# Altium PCB NS6202_V2.0.PcbDoc
Units mm, origin at the board's own origin, x right, y up, seen from the top; angles counter-clockwise.
Board outline 60.47 x 59.8 mm, 2 copper layers (Top, Bottom), stack 0.323 mm thick; 94 components, 108 nets, 384 pads, 221 vias.
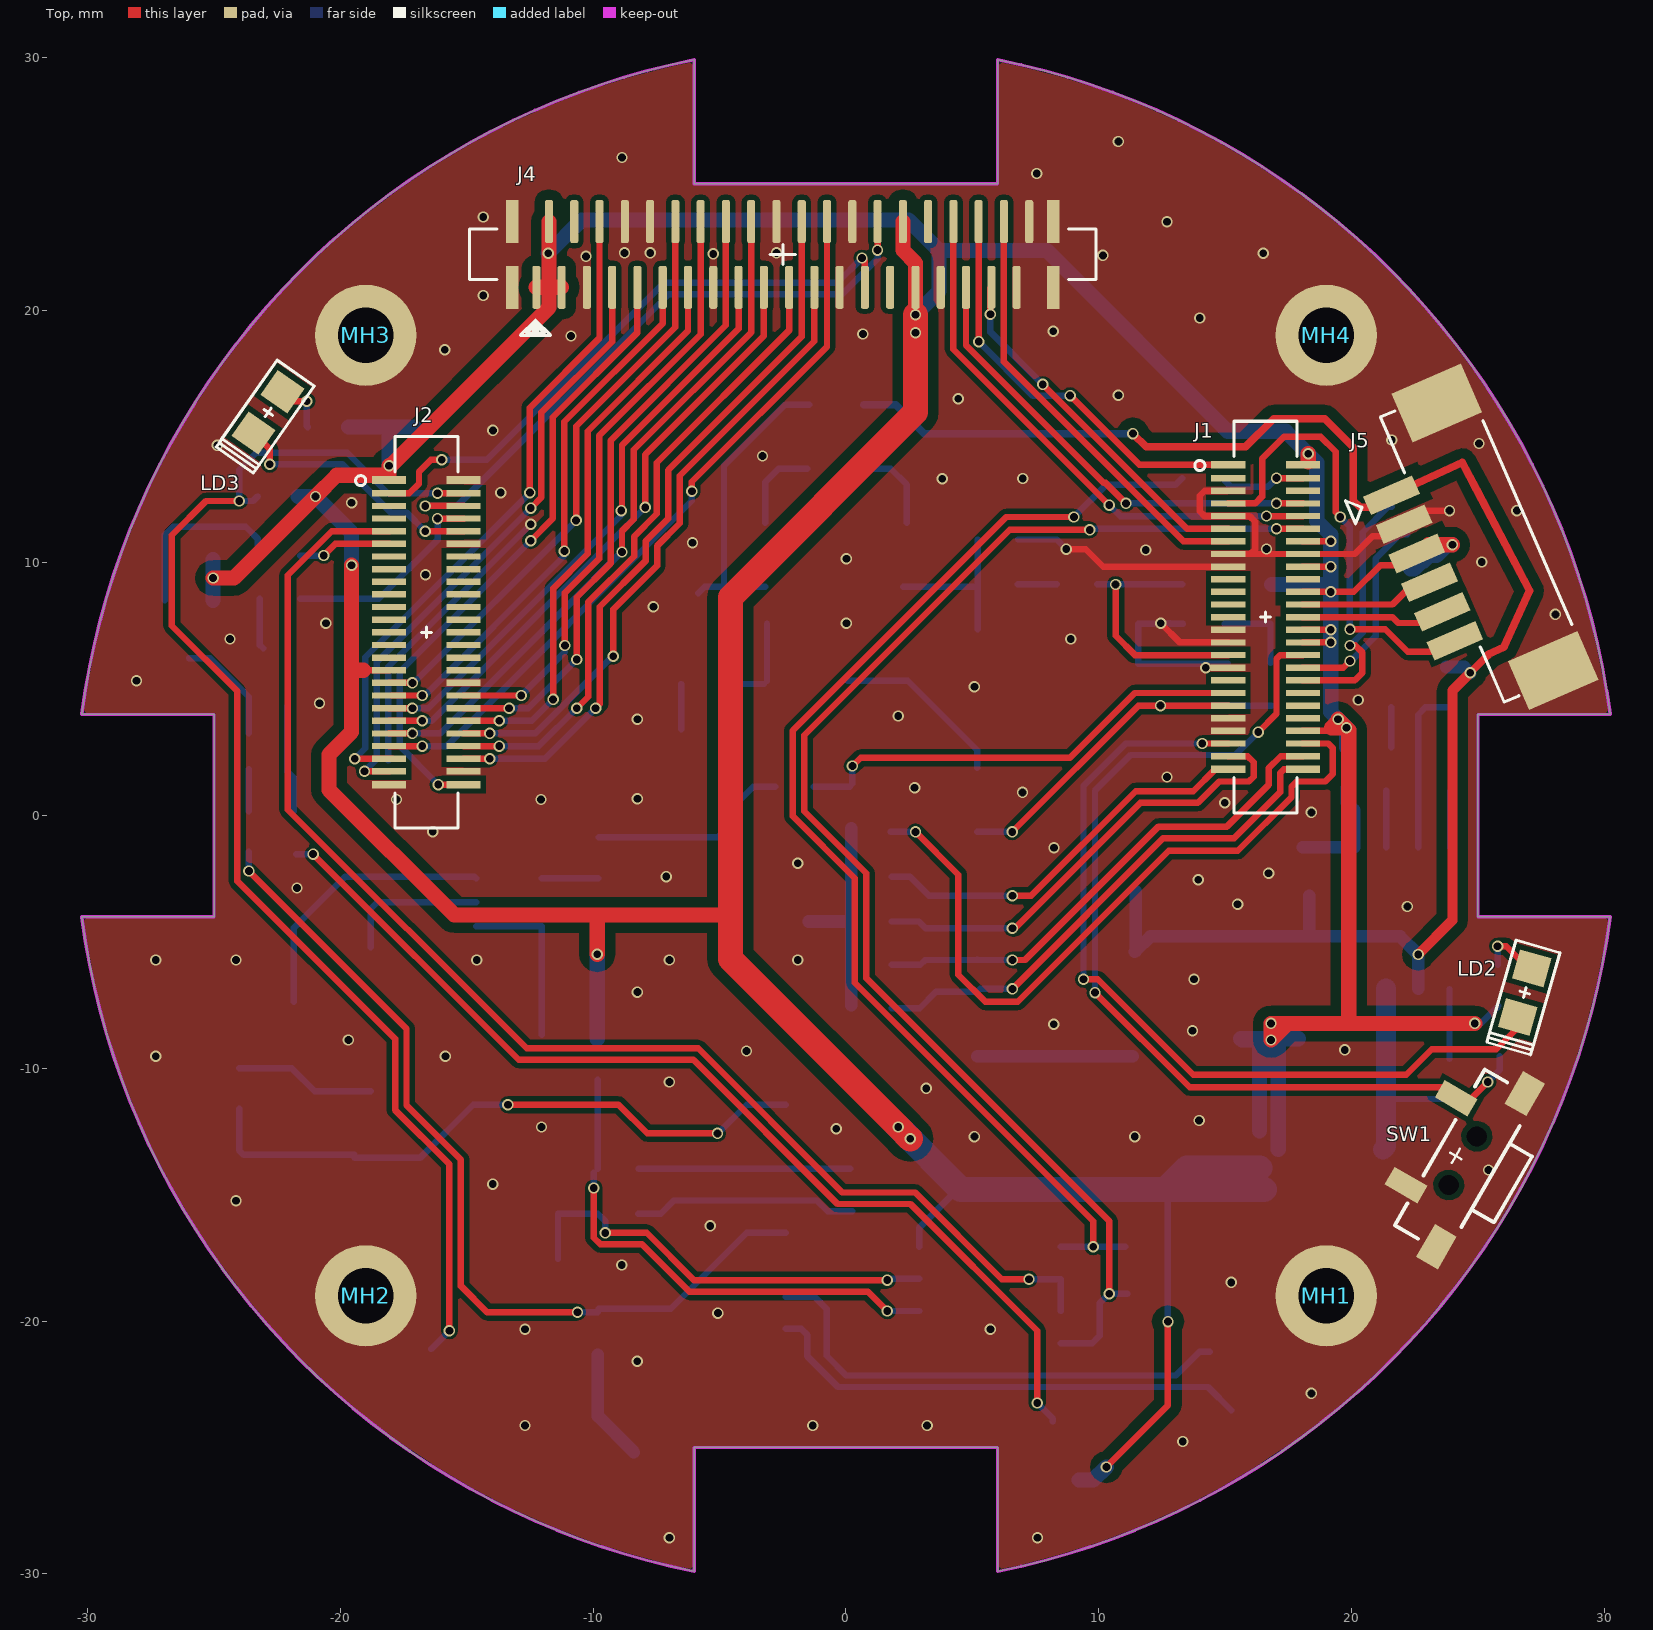
[diagram p0: Top view]
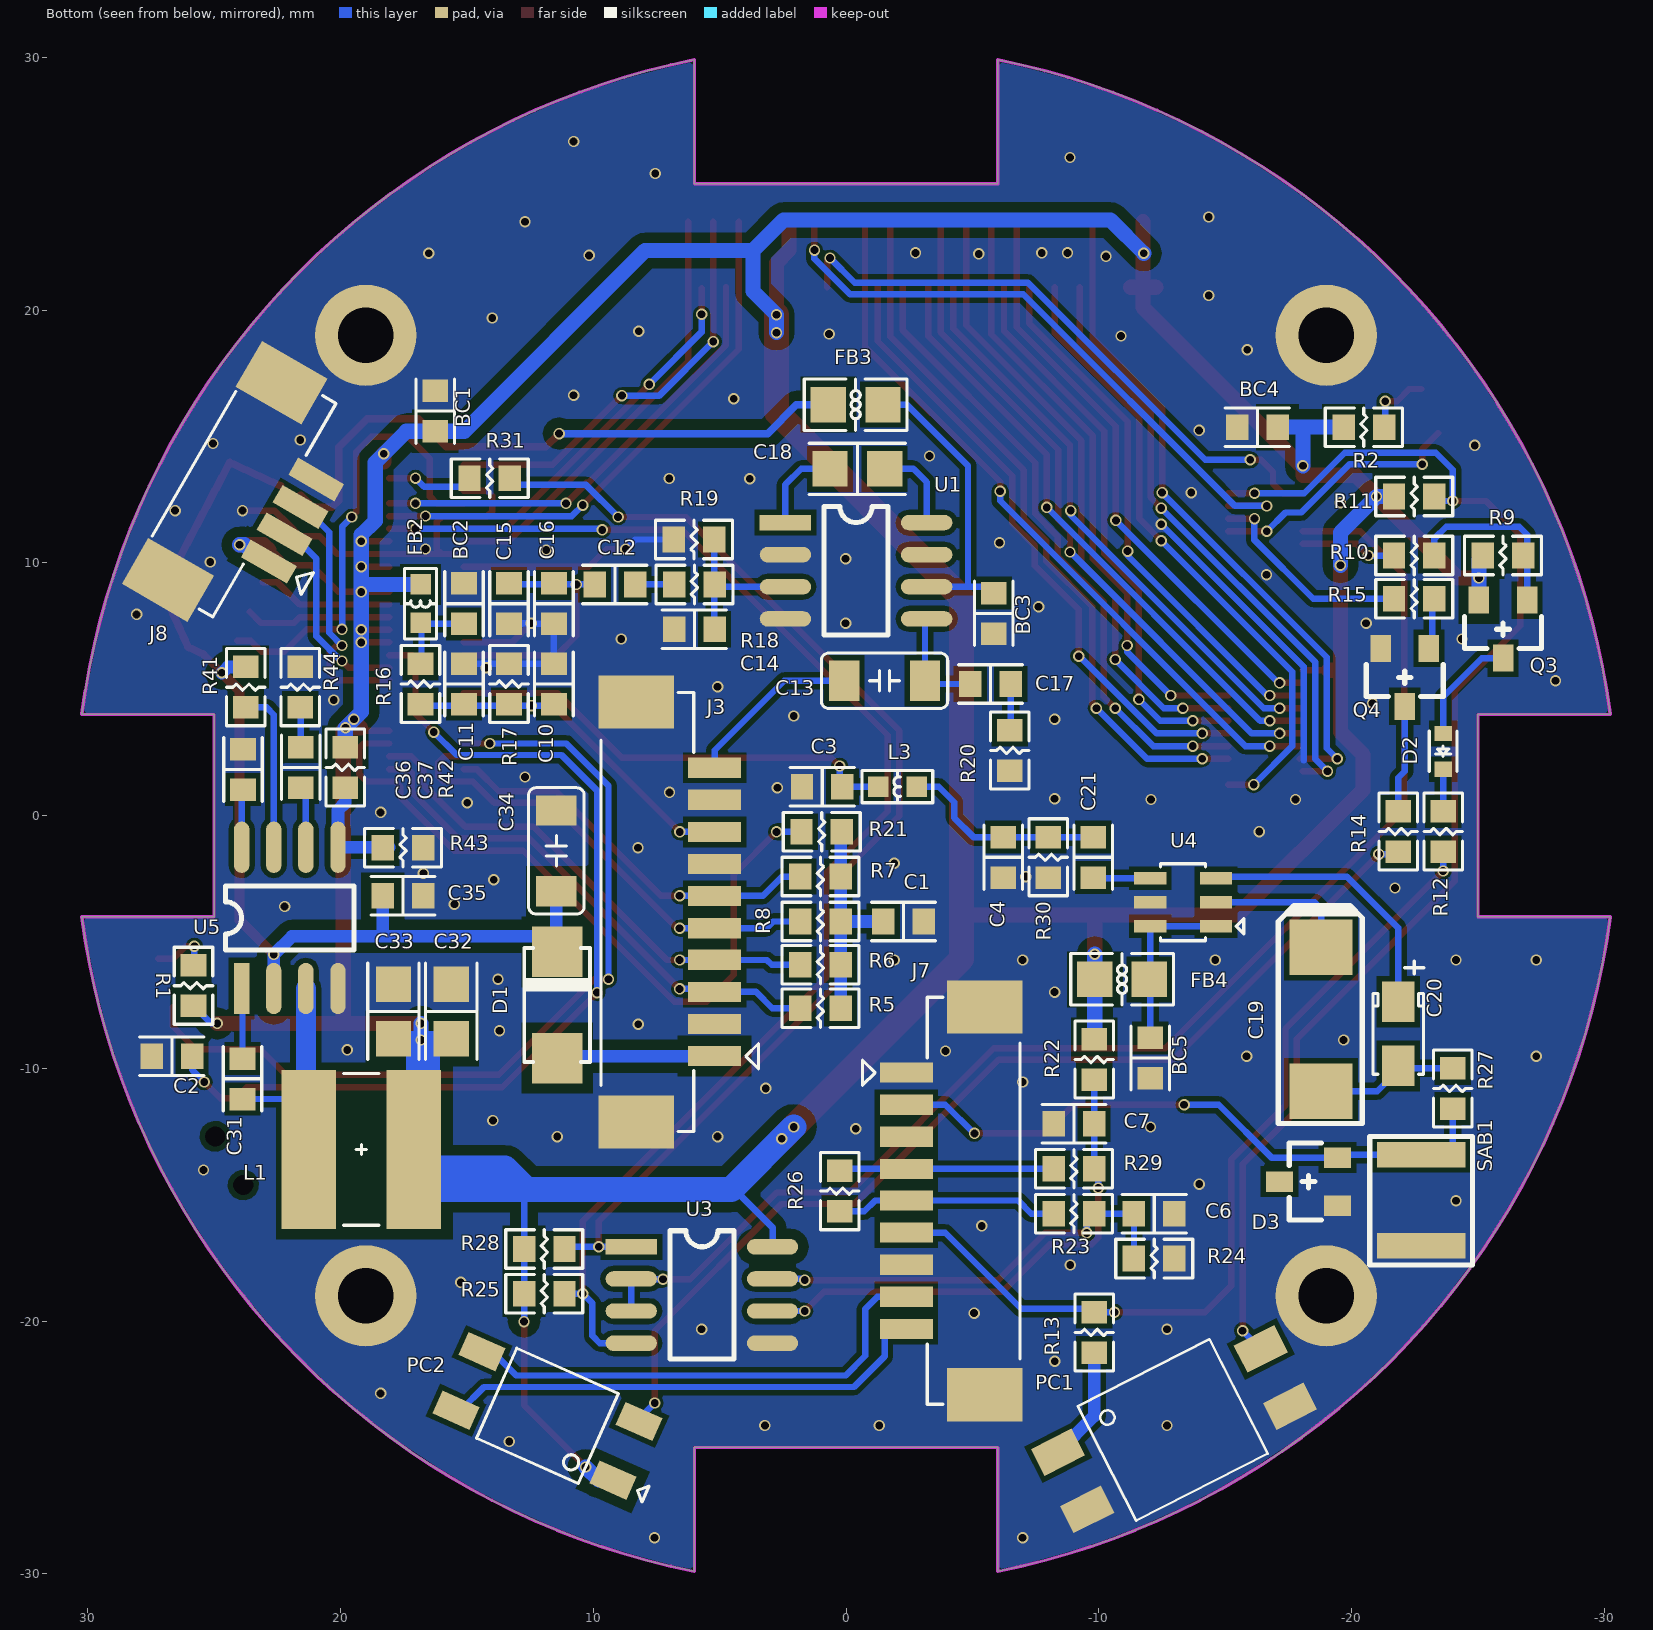
[diagram p1: Bottom view, seen from below]

## Layer stack, top to bottom
Solder Mask Top: solder mask 0.0102, Solder Resist, Dk 3.5
Top: signal copper 0.0343
Dielectric 1: core 0.254, FR-4, Dk 4.2
Bottom: signal copper 0.0343
Solder Mask Bottom: solder mask 0.0102, Solder Resist, Dk 3.5

## Board outline
-30.234,-4 -25,-4 -25,4 -30.234,4 -30.234,4.022 cw(c0,0) -6.018,29.9 -6,29.9 -6,25 6,25 6,29.9 6.011,29.902 cw(c0,0) 30.234,4.018 30.234,4 25,4 25,-4 30.228,-4 30.236,-4.001 cw(c0,0) 6.008,-29.902 6,-29.9 6,-25 -6,-25 -6,-29.9 -6.011,-29.902 cw(c0,0)

## Design rules (kind name [scope] priority, off if disabled: settings)
Clearance Clearance_4 [OnLayer('Keep-Out Layer') vs InNet('GND')] p1: gap=0.001
Clearance Clearance_3 [IsRegion vs (InNet('+12V') OR InNet('+12V_POE') OR InNet('+3.3V')OR InNet('+1.8V') or Innet('+5.0V')or Innet('N17301853'))] p2: gap=0.4
Clearance Clearance_2 [(InComponent('U1') OR InComponent('U4') OR InComponent('J2') OR InComponent('J7') OR InComponent('J8'))] p3: gap=0.2
Clearance Clearance_1 [IsVia] p4: gap=0.01
Clearance [All] p5: gap=0.2
ComponentClearance ComponentClearance_1 [InComponent('J6')] p1: gap=0 collisioncheckmode=3 verticalgap=0 showdistances=FALSE
ComponentClearance [All] p2: gap=0.01 collisioncheckmode=3 verticalgap=0.254 showdistances=FALSE
HoleSize [All] p1: absolutevalues=TRUE maxlimit=3.27 minlimit=0.025 maxpercent=80.000 minpercent=20.000
HoleToHoleClearance [All] p1: gap=0.01 allowstackedmicrovias=TRUE
MinimumSolderMaskSliver [All] p1: minsoldermaskwidth=0.01
PlaneConnect "Power Plane Connect Style - pads with no thermal_2" [(Name='U44-1') Or (Name='U45-1') Or (Name='U46-1') Or (Name='U47-1') Or (Name='U48-1') Or (Name='U49-1') Or (Name='U50-1') Or (Name='U51-1') Or (Name='U52-1') Or (Name='U55-1') Or (Name='U56-1') Or (Name='U57-1') Or (Name='U58-1') Or (Name='U6-1') Or (Name='U7-1') Or (Name='U8-1') Or (Name='U9-1')] p1: planeconnectstyle=NoConnect reliefexpansion=0.508 reliefentries=4 reliefconductorwidth=0.254 reliefairgap=0.254 // PAD - No Thermal Connect Rule
PlaneConnect "Power Plane Connect Style - pads with no thermal" [(Name='J10-0') Or (Name='J10-0/2') Or (Name='J11-0') Or (Name='J11-0/2') Or (Name='J13-6') Or (Name='J13-7') Or (Name='J2-13') Or (Name='J2-14') Or (Name='J4-15') Or (Name='J4-16') Or (Name='J6-5') Or (Name='J6-6') Or (Name='J6-9') Or (Name='J6-10') Or (Name='LS1-5') Or (Name='LS1-6') Or (Name='LS1-7') Or (Name='SW1-1') Or (Name='SW1-4') Or (Name='U10-1') Or (Name='U11-1') Or (Name='U12-1') Or (Name='U13-1') Or (Name='U14-1') Or (Name='U15-1') Or (Name='U16-1') Or (Name='U17-1') Or (Name='U18-1') Or (Name='U19-1') Or (Name='U20-1') Or (Name='U21-1') Or (Name='U22-1') Or (Name='U23-1') Or (Name='U24-1') Or (Name='U25-1') Or (Name='U26-1') Or (Name='U27-1') Or (Name='U28-1') Or (Name='U29-1') Or (Name='U30-1') Or (Name='U31-1') Or (Name='U32-1') Or (Name='U33-1') Or (Name='U34-1') Or (Name='U35-1') Or (Name='U36-1') Or (Name='U37-1') Or (Name='U38-1') Or (Name='U39-1') Or (Name='U40-1') Or (Name='U41-1') Or (Name='U42-1') Or (Name='U43-1')] p2: planeconnectstyle=NoConnect reliefexpansion=0.508 reliefentries=4 reliefconductorwidth=0.254 reliefairgap=0.254 // PAD - No Thermal Connect Rule
PlaneConnect [All] p3: planeconnectstyle=Relief reliefexpansion=0.508 reliefentries=4 reliefconductorwidth=0.254 reliefairgap=0.254
PolygonConnect [All] p1: connectstyle=Direct reliefconductorwidth=0.254 reliefentries=4 polygonreliefangle="90 Angle" airgapwidth=0.254
RoutingVias [All] p1: holewidth=0.308 width=0.45 viastyle="Through Hole" minholewidth=0.308 minwidth=0.45 maxholewidth=0.308 maxwidth=0.45
SilkToBoardRegionClearance [All] p1 off:
SilkToSilkClearance [All] p1: silktosilkclearance=0.01
SilkToSolderMaskClearance SilkToSolderMaskClearance_1 [OnLayer('Multi-Layer')] p1: minsilkscreentomaskgap=0 clearancetoexposedcopper=TRUE
SilkToSolderMaskClearance [IsPad] p2: minsilkscreentomaskgap=0.01 clearancetoexposedcopper=TRUE
SolderMaskExpansion [All] p1: expansion=0.102
Width Width_2 [InNet('VDD_3.3V')  or InNet('VDD_5.0V')] p1: maxlimit=3 minlimit=0.254 preferedwidth=2.4
Width Width_1 [InNet('+12V')] p2: maxlimit=1 minlimit=0.3 preferedwidth=0.5
Width [All] p3: maxlimit=1 minlimit=0.254 preferedwidth=0.254
21 further rules are at their usual default settings.

## Components (designator, comment, footprint, x,y, rotation, side; value= is the part's Value field where it differs from the comment)
BC1 "0.1uF" CS-1608#1 16.256,16.002 r270 bottom
BC2 "0.1uF" CS-1608#1 15.113,8.382 r270 bottom
BC3 "0.1uF" CS-1608#1 -5.842,8.001 r270 bottom
BC4 "0.1uF" CS-1608#1 -16.274,15.367 r180 bottom
BC5 "0.1uF" CS-1608#1 -12.035,-9.593 r270 bottom
C1 "0.1uF" CS-1608#1 -2.271,-4.191 r180 bottom
C2 "1nF/NI" CS-1608#1 26.67,-9.525 r0 bottom
C3 "100pF" CS-1608#2 0.942,1.143 r180 bottom
C4 "270pF" CS-1608#1 -6.223,-1.651 r270 bottom
C6 "2.2nF" CS-1608#1 -12.192,-15.748 r0 bottom
C7 "2.2nF" CS-1608#1 -9.017,-12.192 r180 bottom
C10 "220pF" CS-1608#1 11.557,5.207 r270 bottom
C11 "1nF" CS-1608#1 15.113,5.207 r270 bottom
C12 "2.2nF" CS-1608#1 9.144,9.144 r180 bottom
C13 "22uF" C3216 -1.524,5.334 r180 bottom
C14 "2.2nF" CS-1608#1 6,7.366 r0 bottom
C15 "1nF" CS-1608#1 13.335,8.382 r90 bottom
C16 "220pF" CS-1608#1 11.557,8.382 r90 bottom
C17 "47pF" CS-1608#1 -5.715,5.207 r0 bottom
C18 "10uF" CS-2012 -0.447,13.716 r180 bottom
C19 "100uF-10V" C6032 -18.796,-8.128 r270 bottom
C20 "22uF-16V" CTS-3216 -21.844,-8.636 r270 bottom
C21 "0.1uF" CS-1608#1 -9.779,-1.651 r90 bottom
C31 "10nF" CS-1608#1 23.876,-10.414 r270 bottom
C32 "22uF-2012-6.3V" CS-2012 15.621,-7.747 r90 bottom
C33 "22uF-2012-6.3V" CS-2012 17.907,-7.747 r90 bottom
C34 "4.7uF-25V" C3216 11.46,-1.397 r90 bottom
C35 "0.1uF" CS-1608#1 17.526,-3.175 r180 bottom
C36 "0.1uF" CS-1608#1 23.855,1.825 r90 bottom
C37 "3.3nF" CS-1608#1 21.575,1.905 r90 bottom
D1 "RB051L-40" SOD-106 11.43,-7.493 r270 bottom
D2 "1N4148" SOD-523 -23.622,2.54 r90 bottom
D3 "DZ23-C2V7" SOT-23 -18.288,-14.478 r0 bottom
FB2 "60" LS-1608 16.834,8.382 r270 bottom
FB3 "60" LS-2012 -0.381,16.256 r180 bottom
FB4 "60" LS-2012 -10.922,-6.477 r180 bottom
J1 "AXK6F50547" AXK6F50547 16.6,7.85 r270 top locked
J2 "AXK6F50547" AXK6F50547 -16.6,7.25 r270 top locked
J3 "12505WS-10" 12505WS-10P 6.75,-3.81 r90 bottom
J4 "05005HS-40" 05005HS-40P -2.5,22.2 r0 top locked
J5 "12505WS-06" 12505WS-6P 24.257,10.414 r293.5 top
J7 "12505WS-09" 12505WS-9P -3.937,-15.24 r270 bottom
J8 "12505WS-4P//NI" 12505WS-4P 23.241,12.446 r300 bottom
L1 "CDRH5D18NP-100NC-10uH" CDRH5D18NP 19.177,-13.208 r270 bottom
L3 "2.7uH" LS-1608 -2.032,1.143 r0 bottom
LD2 "LED" LED2012 26.853,-7.004 r74 top
LD3 "LED" LED2012 -22.86,15.951 r55 top
MH1 "4.04pi" VA-2.2 19,-19 r0 top locked
MH2 "4.04pi" VA-2.2 -19,-19 r0 top locked
MH3 "4.04pi" VA-2.2 -19,19 r0 top locked
MH4 "4.04pi" VA-2.2 19,19 r0 top locked
PC1 "PC817" PC817 -12.954,-24.219 r153 bottom
PC2 "ASSR-4118" ASSR-4118 11.811,-23.749 r114 bottom
Q3 "MMBT3906" SOT-23 -25.987,7.366 r270 bottom
Q4 "MMBT6427" SOT-23 -22.098,5.461 r270 bottom
R1 "1K" RS-1608 25.813,-6.73 r270 bottom
R2 "1K" RS-1608 -20.485,15.367 r0 bottom
R5 "51" RS-1608 1.016,-7.62 r180 bottom
R6 "51" RS-1608 1.016,-5.905 r180 bottom
R7 "51" RS-1608 1.016,-2.413 r180 bottom
R8 "51" RS-1608 1.016,-4.191 r180 bottom
R9 "10K" RS-1608 -25.987,10.287 r180 bottom
R10 "1K" RS-1608 -22.479,10.287 r180 bottom
R11 "10K" RS-1608 -22.479,12.623 r0 bottom
R12 "330" RS-1608 -23.622,-0.635 r90 bottom
R13 "2.2K" RS-1608 -9.817,-20.447 r270 bottom
R14 "330" RS-1608 -21.844,-0.635 r90 bottom
R15 "1K" RS-1608 -22.479,8.574 r180 bottom
R16 "2.2K" RS-1608 16.834,5.207 r90 bottom
R17 "2.2K" RS-1608 13.335,5.207 r270 bottom
R18 "1K" RS-1608 6,9.144 r180 bottom
R19 "10K" RS-1608 6.011,10.922 r180 bottom
R20 "10" RS-1608 -6.477,2.579 r90 bottom
R21 "0" RS-1608 0.962,-0.645 r0 bottom
R22 "10K" RS-1608 -9.817,-9.652 r90 bottom
R23 "47" RS-1608 -9.017,-15.748 r0 bottom
R24 "10K" RS-1608 -12.192,-17.526 r0 bottom
R25 "10K" RS-1608 11.938,-18.923 r0 bottom
R26 "120/NI" RS-1608 0.254,-14.859 r270 bottom
R27 "75" RS-1608 -24.003,-10.795 r270 bottom
R28 "10K" RS-1608 11.938,-17.145 r0 bottom
R29 "47" RS-1608 -9.017,-13.97 r0 bottom
R30 "75" RS-1608 -8.001,-1.651 r90 bottom
R31 "100" RS-1608 14.097,13.35 r180 bottom
R41 "100K" RS-1608 23.749,5.08 r270 bottom
R42 "26.1K_1%" RS-1608 19.812,1.905 r270 bottom
R43 "10K_1%" RS-1608 17.526,-1.27 r0 bottom
R44 "2.2K" RS-1608 21.59,5.08 r270 bottom
SAB1 "CSA70-301L" CSA70 -22.751,-17.018 r180 bottom
SW1 "Tact-small//ITA-1102" SWOP-2 24.13,-13.462 r240 top
U1 "LM386M-1" SOIC-8 -0.381,9.652 r270 bottom
U3 "MAX3485ESA" SOIC-8 5.715,-19 r270 bottom
U4 "NJM2561F1" SOT-23-6P -13.335,-3.429 r270 bottom
U5 "MP1482" SOIC-8 21.971,-4.064 r180 bottom

## Footprints (in the part's own frame and the unit in brackets; to place one, negate y for a bottom-side part, rotate by r counter-clockwise, add the part's x,y. Pads: shape width x height; smd on the part's side, far side on the other; paste and mask are expansions set on the pad)
05005HS-40P [mm]
  rrect50% 0.32x1.7 smd: 1(-9.75,-1.3) 2(-9.25,1.3) 3(-8.75,-1.3) 4(-8.25,1.3) 5(-7.75,-1.3) 6(-7.25,1.3) 7(-6.75,-1.3) 8(-6.25,1.3) 9(-5.75,-1.3) 10(-5.25,1.3) 11(-4.75,-1.3) 12(-4.25,1.3) 13(-3.75,-1.3) 14(-3.25,1.3) 15(-2.75,-1.3) 16(-2.25,1.3) 17(-1.75,-1.3) 18(-1.25,1.3) 19(-0.75,-1.3) 20(-0.25,1.3) 21(0.25,-1.3) 22(0.75,1.3) 23(1.25,-1.3) 24(1.75,1.3) 25(2.25,-1.3) 26(2.75,1.3) 27(3.25,-1.3) 28(3.75,1.3) 29(4.25,-1.3) 30(4.75,1.3) 31(5.25,-1.3) 32(5.75,1.3) 33(6.25,-1.3) 34(6.75,1.3) 35(7.25,-1.3) 36(7.75,1.3) 37(8.25,-1.3) 38(8.75,1.3) 39(9.25,-1.3) 40(9.75,1.3)
  rect 0.5x1.7 smd: M1(-10.7,1.3) M2(-10.7,-1.3) M3(10.7,1.3) M4(10.7,-1.3)
  silkscreen extent -12.4,-3.2 12.4,1
12505WS-4P [mm]
  rect 0.8x2.1 smd: 1(1.875,1.55) 2(0.625,1.55) 3(-0.625,1.55) 4(-1.875,1.55)
  rect 2.1x3 smd: 5(-4.5,-1.55) 6(4.5,-1.55)
  silkscreen extent -4.88,-2.95 4.88,3.3
12505WS-6P [mm]
  rect 0.8x2.1 smd: 1(-3.145,-1.55) 2(-1.895,-1.55) 3(-0.625,-1.55) 4(0.625,-1.55) 5(1.895,-1.55) 6(3.145,-1.55)
  rect 2.1x3 smd: M1(-5.77,1.55) M2(5.77,1.55)
  silkscreen extent -6.14,-3.31 6.15,2.95
12505WS-9P [mm]
  rect 0.8x2.1 smd: 1(-5.07,-1.55) 2(-3.8,-1.55) 3(-2.53,-1.55) 4(-1.26,-1.55) 5(-0.01,-1.55) 6(1.26,-1.55) 7(2.53,-1.55) 8(3.8,-1.55) 9(5.07,-1.55)
  rect 2.1x3 smd: 10(7.675,1.55) 11(-7.675,1.55)
  silkscreen extent -8.05,-3.29 8.05,2.95
12505WS-10P [mm]
  rect 0.8x2.1 smd: 1(-5.705,-1.55) 2(-4.435,-1.55) 3(-3.165,-1.55) 4(-1.895,-1.55) 5(-0.645,-1.55) 6(0.625,-1.55) 7(1.895,-1.55) 8(3.165,-1.55) 9(4.435,-1.55) 10(5.705,-1.55)
  rect 2.1x3 smd: 11(-8.31,1.55) 12(8.31,1.55)
  silkscreen extent -8.68,-3.29 8.68,2.95
ASSR-4118 [mm]
  rect 1x1.6 smd: 1(-1.27,-3.4) 2(1.27,-3.4) 3(1.27,3.4) 4(-1.27,3.4)
  silkscreen extent -1.95,-4.8 1.95,2.2
AXK6F50547 [mm]
  rect 0.3x1.35 smd: 1(-6.025,-1.475) 2(-6.025,1.475) 49(6.025,-1.475) 50(6.025,1.475)
  rect 0.25x1.35 smd: 3(-5.5,-1.475) 4(-5.5,1.475) 5(-5,-1.475) 6(-5,1.475) 7(-4.5,-1.475) 8(-4.5,1.475) 9(-4,-1.475) 10(-4,1.475) 11(-3.5,-1.475) 12(-3.5,1.475) 13(-3,-1.475) 14(-3,1.475) 15(-2.5,-1.475) 16(-2.5,1.475) 17(-2,-1.475) 18(-2,1.475) 19(-1.5,-1.475) 20(-1.5,1.475) 21(-1,-1.475) 22(-1,1.475) 23(-0.5,-1.475) 24(-0.5,1.475) 25(0,-1.475) 26(0,1.475) 27(0.5,-1.475) 28(0.5,1.475) 29(1,-1.475) 30(1,1.475) 31(1.5,-1.475) 32(1.5,1.475) 33(2,-1.475) 34(2,1.475) 35(2.5,-1.475) 36(2.5,1.475) 37(3,-1.475) 38(3,1.475) 39(3.5,-1.475) 40(3.5,1.475) 41(4,-1.475) 42(4,1.475) 43(4.5,-1.475) 44(4.5,1.475) 45(5,-1.475) 46(5,1.475) 47(5.5,-1.475) 48(5.5,1.475)
  silkscreen extent -7.75,-2.8 7.75,1.25
C3216 [mm]
  rect 1.2x1.6 smd: 1(-1.6,0) 2(1.6,0)
  silkscreen extent -2.5,-1.1 2.5,1.1
C6032 [mm]
  rect 2.2x2.5 smd: 1(-2.921,0) 2(2.779,0)
  silkscreen extent -4.56,-1.7 4.06,1.63
CDRH5D18NP [mm]
  rect 6.3x2.15 smd: 1(0,-2.075) 2(0,2.075)
  silkscreen extent -3,-0.7 3,0.7
CS-1608#1 [mil]
  rect 35x40 smd: 1(-31.5,0) 2(31.5,0)
  silkscreen extent -50,-30 50,30
CS-1608#2 [mil]
  rect 35x40 smd: 1(31.5,0) 2(-31.5,0)
  silkscreen extent -50,-30 50,30
CS-2012 [mil]
  rect 55x55 smd: 1(-42.5,0) 2(42.5,0)
  silkscreen extent -75,-40 75,40
CSA70 [mm]
  rect 3.5x1 smd: 1(0,0) 2(0,3.6)
  silkscreen extent -2.03,-0.76 2.03,4.32
CTS-3216 [mil]
  rect 63x51 smd: 1(-50,0) 2(50,0)
  silkscreen extent -113,-39 63,40
LED2012 [mil]
  rect 47x51 smd: 1(39.37,0) 2(-39.37,0)
  silkscreen extent -91,-35 75,35
LS-1608 [mil]
  rect 32x32 smd: 1(-30,0) 2(30,0)
  silkscreen extent -55,-25 55,25
LS-2012 [mil]
  rect 55x55 smd: 1(-42.5,0) 2(42.5,0)
  silkscreen extent -80,-40 80,40
PC817 [mm]
  rect 1.8x1.2 smd: 1(-4.506,1.208) 2(-4.506,-1.332) 3(4.494,-1.332) 4(4.494,1.208)
  silkscreen extent -2.98,-2.6 2.86,2.48
RS-1608 [mil]
  rect 35x40 smd: 1(-31.5,0) 2(31.5,0)
  silkscreen extent -60,-30 60,30
SOD-106 [mm]
  rect 2x2 smd: 1(2.1,0) 2(-2.1,0)
  silkscreen extent -2.25,-1.3 2.25,1.3
SOD-523 [mm]
  rect 0.6x0.7 smd: 1(0.71,0) 2(-0.71,0)
  silkscreen extent -0.8,-0.55 0.8,0.55
SOIC-8 [mil]
  rect 24x80 smd: 1(-76.34,-109.45)
  oval 24x80 smd: 2(-26.34,-109.45) 3(23.66,-109.45) 4(73.66,-109.45) 5(73.66,110.55) 6(23.66,110.55) 7(-26.34,110.55) 8(-76.34,110.55)
  silkscreen extent -101,-49 99,51
SOT-23 [mil]
  rect 42x32 smd: 1(-45.45,37.75) 2(-45.45,-37.35) 3(44.85,0.2)
  silkscreen extent -20,-60 30,60
SOT-23-6P [mm]
  rect 0.508x1.27 smd: 1(0.95,1.3) 2(0,1.3) 3(-0.95,1.3) 4(-0.95,-1.3) 5(0,-1.3) 6(0.95,-1.3)
  silkscreen extent -1.52,-0.89 1.52,2.4
SWOP-2 [mm]
  rect 0.8x1.5 smd: 1(-1.98,-1.13) 2(1.99,-1.13)
  rect 1.5x1 smd: 3(-3.5,1.13) 4(3.5,1.13)
  round 0.025 hole 0.8 unplated: 5(-1.08,0.33) 6(1.14,0.33)
  silkscreen extent -3.53,-0.72 3.59,2.62
VA-2.2 [mm]
  rrect100% 4x4 hole 2.2: 1(0,0)

## Via types
v1: diameter 0.45, hole 0.308, Top to Bottom, tented both sides, 221 vias

## Nets (pads, with @x,y where several pads share a name; then routed paths per layer and width w, separated by ;. In a path a pad name is that pad's centre, name@x,y a point inside that pad or via, vN(x,y) a via of type N, cw(c..) or ccw(c..) an arc to the next point about the centre after c; other vN are vias at no path point)
+3.3V: BC1.2 BC4.2 C32.1 C33.1 FB2.1 FB4.1 J1.2 J1.14 J1.18 J1.22 J1.28 J1.30 J1.44 J2.1 J2.31 J4.1 J4.2 J4.3 J4.30 J4.31 J5.3 J8.1 L1.2 PC2.1 Q3.2 R1.2 R2.2 R9.1 R11.2 R22.2 R25.2 R28.2 R42.1 U3.8 | length 247.9
  Top w0.254: -19.082,5.75 J2.31 ; v1(10.303,-25.77) 12.738,-23.334 v1(12.738,-20.02) ; J1.44 19.122,3.35 ; J1.30 v1@19.122,6.85 ; J1.28 v1@19.122,7.35 ; J1.22 v1@19.122,8.85 ; J1.18 v1@19.122,9.85 ; J1.14 v1@19.122,10.85 ; v1(19.177,8.85) 20.09,8.85 21.146,9.906 22.123,9.906 J5.3
  Top w0.6: v1(-25.039,9.398) -24.212,9.398 v1(-20.987,12.623) -20.148,13.462 -18.075,13.462 ; v1(-19.558,9.906) -19.559,5.75 ; -19.082,5.75 -19.559,5.75 ; v1(-18.075,13.843) -18.075,13.462 ; J4.1 -11.75,20.9 ; J4.2 -11.75,20.9 ; J4.3 -11.75,20.9 ; v1(-9.842,-5.486) -9.842,-4 -9.779,-3.937 ; -4.699,-3.937 -9.779,-3.937 ; J4.30 2.25,22.367 2.75,21.867 J4.31 v1(2.75,19.812) ; J1.2@18.288,13.999 v1(18.288,14.313) ; 19.866,-8.222 19.892,-8.196 v1@19.892,3.389 ; J5.3@22.832,10.508 23.04,10.716 v1(23.992,10.716) ; v1(24.878,-8.222) 17.471,-8.222 ; -19.559,5.75 -19.559,5.368 -19.559,3.301 -20.447,2.413 -20.447,1.016 -15.494,-3.937 -9.779,-3.937 ; -18.075,13.462 -18.075,13.776 -11.75,20.101 -11.75,20.9 ; 17.471,-8.222 v1(16.816,-8.222) v1(16.816,-8.877) 17.471,-8.222 ; 19.209,3.477 19.471,3.739 v1(19.471,3.81) v1(19.804,3.477) 19.209,3.477
  Top w1: v1(2.54,-12.789) v1(2.07,-12.319) -4.572,-5.677 -4.572,8.636 2.75,15.958 v1(2.75,19.812)
  Bottom w0.254: U3.8 2.907,-16.297 4.413,-14.79 4.542,-14.79 ; v1(12.738,-20.02) R25.2 12.738,-14.887 ; v1(24.878,-8.222) 25.122,-8.222 R1.2
  Bottom w0.6: Q3.2 v1(-25.039,9.398) R9.1@-25.039,10.131 ; R11.2 v1(-20.987,12.623) -19.558,11.194 v1(-19.558,9.906) ; R2.2 -18.034,15.367 ; v1(-18.075,13.843) -18.075,15.326 -18.034,15.367 ; BC4.2 -18.034,15.367 ; v1(-11.778,22.245) -10.465,23.558 2.477,23.558 3.683,22.352 ; R22.2@-9.842,-8.826 FB4.1 v1(-9.842,-5.486) ; v1(2.75,19.106) v1(2.75,19.812) 3.683,20.745 3.683,22.352 ; PC2.1 9.78,-26.292 v1(10.303,-25.77) ; C32.1 C33.1 ; C32.1@15.672,-8.877 v1(16.816,-8.877) ; L1.2@16.363,-12.469 16.363,-8.877 ; 16.816,-10.029 v1(16.816,-8.877) ; v1(16.816,-8.222) v1(16.816,-8.877) ; FB2.1 19.177,9.144 ; L1.2 17.102,-8.877 ; R42.1 19.812,3.469 v1(19.804,3.477) 19.177,4.104 v1(19.177,6.85) v1(19.177,7.35) v1(19.177,8.85) 19.177,9.144 ; J8.1@22.331,9.758 22.478,9.758 22.766,10.047 J8.1 23.076,10.287 23.368,10.287 23.797,10.716 v1(23.992,10.716) ; 3.683,22.352 7.956,22.352 15.107,15.202 BC1.2 17.399,15.202 18.627,13.974 18.627,11.66 19.177,11.109 v1(19.177,10.85) 19.177,9.144
  Bottom w1: v1(2.07,-12.319) 4.542,-14.79 11.996,-14.79 12.642,-14.79 ; L1.2@16.366,-13.944 13.488,-13.944 12.642,-14.79 ; L1.2@16.543,-14.79 12.642,-14.79
  other v1: 19.177,9.85
+12V: C34.1 C35.1 D1.2 FB3.1 J5.1 R41.1 U5.2 | length 67.1
  Top w0.3: v1(11.352,15.113) 11.879,14.586 15.807,14.586 16.922,15.702 18.942,15.702 20.066,14.578 20.066,12.465 20.34,12.191 21.092,12.191 J5.1 ; J5.1@22.369,13.043 24.384,13.97 24.945,12.901 27.051,8.89 26.035,6.675 25.39,6.37 ; v1(24.698,5.647) 25.4,6.349
  Top w0.4: v1(22.64,-5.495) 23.992,-4.143 23.992,4.941 v1(24.698,5.647)
  Bottom w0.3: FB3.1 1.961,16.256 3.104,15.113 v1(11.352,15.113)
  Bottom w0.5: D1.2 D1.2@11.46,-5.363 ; C34.1 D1.2@11.46,-5.363 ; 18.326,-4.742 C35.1 ; U5.2 v1(22.64,-5.495) 21.925,-4.78 12.043,-4.78 D1.2@11.46,-5.363 ; R41.1 24.454,5.88 v1@24.692,5.642
AIN: C10.2 C11.2 J1.39 J3.8 R16.1 R17.2 | length 17.2
  Top w0.254: v1(6.575,-0.645) 11.57,4.35 v1(12.446,4.35) J1.39
  Bottom w0.254: J3.8 v1(6.575,-0.645) ; C10.2@11.614,4.35 v1(12.446,4.35) R16.1@16.834,4.35
AOUT: C12.1 C15.2 C16.2 J1.31 | length 10.2
  Top w0.254: v1(10.668,9.144) 10.668,7.113 11.431,6.35 J1.31
  Bottom w0.254: C12.1 v1(10.668,9.144) ; v1@10.706,9.182 v1(10.668,9.144) ; C15.2@13.297,9.144 v1(10.668,9.144)
AOUT_CON: C13.1 J3.10 | length 6.9
  Bottom w0.254: C13.1 2.445,5.334 5.2,2.579 J3.10
DAC_OUT: C3.1 J1.37 L3.2 | length 18.2
  Top w0.254: v1(0.254,1.961) 0.579,2.286 8.864,2.286 11.428,4.85 J1.37
  Bottom w0.254: L3.2 C3.1 ; C3.1@0.254,1.255 v1(0.254,1.961)
DI_CON0: J7.6 R12.1 R13.1 | length 35.1
  Top w0.254: v1(-23.622,-2.193) -17.385,-8.43 -17.385,-11.46 -15.234,-13.611 -15.234,-18.614 -14.201,-19.647 v1(-10.622,-19.647)
  Bottom w0.254: v1(-23.622,-2.193) R12.1 ; v1(-10.622,-19.647) R13.1 ; R13.1@-9.779,-19.51 -6.937,-19.51 -3.927,-16.5 J7.6
DI_D0: J2.4 PC1.4 R11.1 | length 52.1
  Top w0.254: v1(-24.003,12.446) -25.317,12.446 -26.67,11.093 -26.67,7.512 -24.076,4.918 -24.076,-2.592 -17.839,-8.829 -17.839,-11.648 -15.688,-13.799 v1(-15.688,-20.38) ; v1(-16.158,12.75) J2.4
  Bottom w0.254: R11.1 -23.456,12.446 v1(-24.003,12.446) -24.003,13.677 -23.329,14.351 -19.729,14.351 -18.128,12.75 v1(-16.158,12.75) ; PC1.4 v1(-15.688,-20.38)
DI_TYPE: J2.11 R10.1 | length 3.7
  Top w0.254: v1(-20.656,10.291) -20.198,10.75 J2.11
  Bottom w0.254: R10.1@-21.588,10.287 -20.661,10.287 v1(-20.656,10.291)
DO_COM_CON: J7.9 PC2.4 | length 19.5
  Bottom w0.254: J7.9 -1.763,-20.31 -1.524,-20.549 -1.524,-21.397 -0.315,-22.606 14.32,-22.606 PC2.4@15.24,-23.526
DO_CON0: J7.8 PC2.3 | length 19.6
  Bottom w0.254: J7.8 -1.242,-19.04 -0.762,-19.52 -0.762,-21.374 0.016,-22.152 13.046,-22.152 13.992,-21.206 PC2.3
DO_D0: J2.8 R15.1 | length 8.3
  Top w0.254: v1(-16.158,11.75) J2.8
  Bottom w0.254: R15.1@-21.588,8.574 -18.485,8.574 -16.158,10.901 v1(-16.158,11.75)
EPHY_RX+: J1.50 J3.3 R5.1 | length 20.4
  Top w0.254: v1(6.585,-6.858) 12.554,-0.889 15.361,-0.889 17.173,0.923 17.173,1.679 17.319,1.825 J1.50
  Bottom w0.254: R5.1 2.917,-7.62 3.562,-6.975 J3.3 ; J3.3@5.317,-6.858 v1(6.585,-6.858)
EPHY_RX-: J1.48 J3.4 R6.1 | length 20.1
  Top w0.254: v1(6.585,-5.715) 7.086,-5.715 12.366,-0.435 15.073,-0.435 16.719,1.211 16.719,1.868 17.202,2.35 J1.48
  Bottom w0.254: R6.1 2.943,-5.905 3.133,-5.715 J3.4@5.19,-5.715 ; J3.4 J3.4@5.19,-5.715 ; v1@6.604,-5.715 v1(6.585,-5.715) J3.4@5.19,-5.715
EPHY_TRCT: J1.46 R21.2 | length 28.9
  Top w0.254: v1(2.75,-0.645) 4.445,-2.34 4.445,-6.293 5.518,-7.366 6.796,-7.366 12.765,-1.397 15.504,-1.397 17.627,0.726 17.627,1.145 17.831,1.348 18.962,1.348 19.265,1.651 19.265,2.667 19.082,2.85 J1.46
  Bottom w0.254: R21.2 v1(2.75,-0.645)
EPHY_TX+: J1.49 J3.6 R7.1 | length 15.7
  Top w0.254: v1(6.585,-3.175) 7.324,-3.175 11.461,0.962 13.737,0.962 14.6,1.825 J1.49
  Bottom w0.254: R7.1 2.523,-2.413 3.285,-3.175 v1(6.585,-3.175)
EPHY_TX-: J1.47 J3.5 R8.1 | length 18.6
  Top w0.254: v1(6.585,-4.455) 6.686,-4.455 11.649,0.508 13.925,0.508 14.765,1.348 15.935,1.348 16.127,1.54 16.127,2.03 16.129,2.032 16.127,2.034 16.127,2.11 15.887,2.35 J1.47
  Bottom w0.254: R8.1 2.884,-4.191 3.148,-4.455 J3.5 v1(6.585,-4.455)
FD_SW: C2.1 J1.32 SW1.1 | length 38.5
  Top w0.254: v1(9.852,-7.004) 13.599,-10.751 23.71,-10.751 SW1.1 24.751,-11.182 v1(25.393,-10.541) ; v1(16.308,3.302) 17.033,4.027 17.033,6.205 17.178,6.35 J1.32
  Bottom w0.254: v1(9.852,-7.004) 9.852,0.992 11.256,2.396 15.402,2.396 v1(16.308,3.302) ; v1(25.393,-10.541) 25.87,-10.064 C2.1
FOCUS_CTRL_CLK: J2.23
FOCUS_CTRL_DIR: J2.26
FOCUS_CTRL_EN: J2.29
FOCUS_CTRL_NFAULT: J2.21
FOCUS_CTRL_NSLEEP: J2.24
GND: BC1.1 BC2.1 BC3.2 BC4.1 BC5.2 C1.2 C2.2 C3.2 C4.2 C6.1 C7.1 C10.1 C11.1 C14.2 C15.1 C16.1 C32.2 C33.2 C34.2 C35.2 C36.2 D3.1 J1.5 J1.9 J1.15 J1.16 J1.17 J1.27 J1.29 J1.33 J1.41 J1.43 J2.2 J2.12 J2.34 J2.48 J2.49 J3.2 J3.7 J3.9 J3.11 J3.12 J4.5 J4.8 J4.10 J4.15 J4.20 J4.25 J4.26 J4.33 J4.39 J4.40 J4.M1 J4.M2 J4.M3 J4.M4 J5.2 J5.M1 J5.M2 J7.1 J7.7 J7.10 J7.11 J8.4 J8.5 J8.6 MH1.1 MH2.1 MH3.1 MH4.1 PC1.2 PC1.3 Q4.2 R17.1 R19.1 R20.1 R24.1 R30.1 R43.1 R44.1 SAB1.1 SW1.2 SW1.3 SW1.4 U1.2 U1.4 U3.5 U4.5 U5.4 | length 45.3
  Top w0.254: v1(8.718,10.541) 9.492,10.541 10.183,9.85 J1.17 ; v1(12.458,7.605) 13.212,6.85 J1.29 ; J1.15 16.002,10.35 ; J1.5 14.2,12.85 13.999,12.649 13.999,12.036 14.185,11.85 J1.9 15.963,11.85 16.191,11.622 16.191,10.539 16.002,10.35 ; v1(23.876,12.065) 22.611,12.065 J5.2 21.595,11.049 20.832,11.049 20.133,10.35 J1.16 16.002,10.35
  Bottom w0.254: -18.107,2.18 -18.107,5.888 v1(-12.47,11.525) ; R19.1 8.337,10.922 v1(8.718,10.541) ; v1@12.458,7.582 C16.1 C10.1 C11.1 ; v1(12.458,7.605) 12.804,7.605 ; 12.804,7.582 C15.1
  other v1: -6.985,-28.575 7.58,-28.575 13.321,-24.765 -12.7,-24.13 -1.318,-24.13 3.211,-24.13 18.415,-22.86 -8.255,-21.59 -12.7,-20.32 5.715,-20.32 -5.065,-19.685 15.24,-18.468 -8.871,-17.78 -5.372,-16.233 -24.13,-15.24 -13.97,-14.58 25.42,-14.023 5.08,-12.701 11.428,-12.701 -0.381,-12.386 -12.046,-12.319 13.97,-12.065 3.175,-10.794 -6.985,-10.541 -27.305,-9.525 -15.847,-9.525 -3.937,-9.312 19.736,-9.271 -19.685,-8.877 13.708,-8.509 8.217,-8.255 -8.251,-6.985 13.77,-6.477 -27.305,-5.715 -24.131,-5.715 -14.605,-5.715 -6.985,-5.715 -1.905,-5.715 22.211,-3.599 15.494,-3.508 -21.717,-2.867 13.941,-2.54 -7.112,-2.413 16.719,-2.286 -1.905,-1.885 8.231,-1.27 -16.345,-0.635 18.415,0.127 14.986,0.508 -17.78,0.635 -12.065,0.635 -8.25,0.663 6.985,0.917 2.715,1.105 12.7,1.524 -8.25,3.81 2.066,3.937 -20.828,4.445 20.264,4.572 5.08,5.098 -28.067,5.334 14.232,5.85 -24.37,6.985 8.89,6.986 -20.574,7.605 0.016,7.605 28.067,7.96 -7.62,8.26 -16.637,9.527 25.157,10.033 0.016,10.164 11.862,10.508 16.637,10.546 -6.07,10.795 26.543,12.067 -19.559,12.378 -13.66,12.776 3.81,13.329 6.995,13.335 -3.302,14.224 -24.872,14.647 25.043,14.722 21.59,14.859 -13.969,15.24 4.445,16.488 10.777,16.629 -15.875,18.426 -10.877,18.972 0.67,19.05 8.2,19.161 13.999,19.685 -14.351,20.574 -10.287,22.122 10.165,22.163 -5.25,22.22 16.51,22.244 -8.763,22.261 -7.747,22.261 -2.751,22.261 12.7,23.495 -14.351,23.683 7.55,25.4 -8.86,26.035 10.777,26.67
I2C_SCL: J1.24 J5.4 | length 5.4
  Top w0.254: J1.24 21.623,8.35 22.496,9.223 J5.4
I2C_SDA: J1.26 J5.5 | length 5.8
  Top w0.254: J1.26 21.623,7.85 21.855,7.618 23.151,7.618 J5.5
IR_PWM: J1.7 J5.6 | length 18.4
  Top w0.254: J1.7 16.191,12.35 16.463,12.622 16.463,14.118 17.331,14.986 18.777,14.986 19.372,14.391 19.372,11.997 v1(19.558,11.811) ; v1(19.939,7.366) 21.341,7.366 22.23,6.477 23.114,6.477 23.549,6.912 J5.6
  Bottom w0.254: v1(19.558,11.811) 19.939,11.43 v1(19.939,7.366)
LED_GN: J2.10 LD3.2 | length 10.3
  Top w0.254: LD3.2 -22.8,14.499 v1(-22.8,13.897) ; v1(-16.646,11.25) J2.10
  Bottom w0.254: v1(-22.8,13.897) -19.917,13.897 -18.012,11.992 -17.388,11.992 v1(-16.646,11.25)
LED_MLINK: J1.45 LD2.2 | length 34.4
  Top w0.254: v1(9.398,-6.477) 9.967,-6.477 13.741,-10.251 22.165,-10.251 23.174,-9.242 25.726,-9.242 26.632,-8.336 LD2.2@26.632,-7.579 ; v1(14.097,2.85) J1.45
  Bottom w0.254: v1(9.398,-6.477) 9.398,1.18 11.068,2.85 v1(14.097,2.85)
LENC_IRIS_PWM1: J2.30
LENC_IRIS_PWM2: J2.27
N15229178: Q3.1 R9.2 R10.2 | length 7.3
  Bottom w0.254: Q3.1 -26.946,11.114 -26.63,11.43 -23.749,11.43 -23.279,10.96 R10.2
N15229370: D2.1 Q3.3 | length 4.5
  Bottom w0.254: Q3.3 -25.15,6.227 -23.622,4.699 D2.1
N15229490: PC1.1 R13.2 | length 4.4
  Bottom w0.5: R13.2@-9.817,-21.336 -9.817,-23.762 PC1.1
N16657531: D2.2 R12.2 | length 1.7
  Bottom w0.254: R12.2 D2.2
N16698572: Q4.3 R14.2 | length 4.3
  Bottom w0.254: Q4.3 -22.103,1.75 -21.844,1.491 R14.2
N17016752: R41.2 U5.7 | length 6.5
  Bottom w0.254: U5.7 22.64,3.995 22.925,4.28 R41.2
N17016775: C36.1 U5.8 | length 2.2
  Bottom w0.254: U5.8 C36.1@23.91,0.97
N17016804: C37.1 U5.6 | length 2.2
  Bottom w0.254: U5.6 C37.1@21.37,0.991
N17016806: C37.2 R44.2 | length 1.6
  Bottom w0.254: C37.2 R44.2@21.575,4.28
N17016820: R42.2 R43.2 U5.5 | length 4.5
  Bottom w0.5: R43.2@18.075,-1.256 U5.5 20.1,0.22 19.812,0.508 R42.2
N17016832: C31.2 L1.1 U5.3 | length 8.9
  Bottom w0.254: L1.1@21.408,-11.214 C31.2
  Bottom w0.8: L1.1 21.37,-13.09 U5.3
N17083443: BC2.2 FB2.2 R16.2 | length 3.3
  Bottom w0.254: BC2.2@14.986,7.582 16.796,7.582 R16.2@16.796,6.045
N17084260: C14.1 R18.2 R19.2 U1.3 | length 6.4
  Bottom w0.254: U1.3@2.272,9.051 R18.2@5.107,9.051 ; C14.1@5.211,7.377 R19.2
N17084264: C12.2 R18.1 | length 1.5
  Bottom w0.254: R18.1 C12.2
N17084571: C13.2 C17.2 U1.5 | length 3.9
  Bottom w0.254: C17.2 C13.2@-3.251,5.207 ; C13.2 U1.5@-3.124,7.589
N17084587: BC3.1 FB3.2 U1.6 | length 11.9
  Bottom w0.254: BC3.1 -5.592,9.051 -4.826,9.051 ; U1.6 -4.826,9.051 ; FB3.2 -2.413,16.256 -4.826,13.843 -4.826,9.051
N17084593: C17.1 R20.2 | length 1.8
  Bottom w0.254: R20.2@-6.515,3.417 C17.1
N17084622: C18.2 U1.8 | length 3.5
  Bottom w0.254: U1.8 -3.189,13.194 -2.667,13.716 C18.2
N17084632: C18.1 U1.1 | length 3.5
  Bottom w0.254: C18.1 1.778,13.716 2.399,13.095 U1.1
N17300121: LD3.1 R2.1 | length 2.7
  Top w0.254: LD3.1@-22.751,16.875 -22.286,16.875 -21.805,16.393 v1(-21.332,16.393)
  Bottom w0.254: v1(-21.332,16.393) -21.332,15.414 R2.1
N17300123: LD2.1 R1.1 | length 2.4
  Top w0.254: v1(25.781,-5.167) 26.121,-5.167 26.619,-5.666 LD2.1@27.216,-5.666
  Bottom w0.254: R1.1@25.781,-5.898 v1(25.781,-5.167)
N17301853: D1.1 J3.1 | length 6.2
  Bottom w0.5: J3.1 D1.1@11.352,-9.515
N17332699: C1.1 R5.2 R6.2 R7.2 R8.2 R21.1 | length 8.7
  Bottom w0.5: C1.1 R8.2 ; R5.2@0.216,-7.493 R8.2 ; R21.1@0.216,-0.508 R8.2
N17333419: C4.1 C21.2 L3.1 R30.2 | length 8.2
  Bottom w0.254: C21.2 R30.2 C4.1 -5.042,-0.851 -4.285,-0.094 -4.285,0.528 -3.67,1.143 L3.1
N17333490: BC5.1 FB4.2 U4.1 U4.6 | length 6.9
  Bottom w0.254: U4.1 U4.6 BC5.1@-12.035,-8.664
N17333506: C19.1 U4.2 | length 5.8
  Bottom w0.254: C19.1 -18.796,-3.683 -18.542,-3.429 U4.2
N17333508: C19.2 C20.2 R27.1 | length 5.6
  Bottom w0.254: R27.1 -21.933,-9.995 -21.021,-10.907 C19.2
N17333510: C20.1 U4.3 | length 11
  Bottom w0.254: C20.1 -21.844,-4.445 -19.812,-2.413 -14.701,-2.413 U4.3
N17333592: C21.1 U4.4 | length 2.2
  Bottom w0.254: U4.4 C21.1@-9.807,-2.479
N17334107: C6.2 R23.1 R24.2 U3.7 | length 17.5
  Top w0.254: v1(-9.525,-16.51) -7.881,-16.51 -6.013,-18.378 v1(1.635,-18.378)
  Bottom w0.254: R24.2 C6.2 R23.1 -9.525,-16.04 v1(-9.525,-16.51) ; v1(1.635,-18.378) 1.635,-18.331 U3.7
N17334109: R28.1 R31.2 U3.1 | length 47.4
  Top w0.254: v1(9.017,11.811) 6.343,11.811 -2.105,3.363 -2.105,-0.019 0.35,-2.473 0.35,-6.617 9.779,-16.046 v1(9.779,-17.061)
  Bottom w0.254: U3.1 v1(9.779,-17.061) R28.1@11.054,-17.061 ; v1(9.017,11.811) 10.287,13.081 13.028,13.081 R31.2
N17334111: C7.2 R22.1 R29.1 U3.6 | length 20.2
  Top w0.254: v1(-9.979,-14.732) -9.979,-16.698 -9.713,-16.964 -8.069,-16.964 -6.201,-18.832 0.866,-18.832 v1(1.635,-19.601)
  Bottom w0.254: v1(-9.979,-14.732) R29.1@-9.979,-14.132 ; R29.1 C7.2 R22.1 ; v1(1.635,-19.601) U3.6
N17340800: PC2.2 R14.1 | length 41
  Top w0.254: v1(-21.082,-1.524) -12.941,-9.665 -6.036,-9.665 -0.333,-15.367 2.55,-15.367 7.565,-20.382 v1(7.565,-23.24)
  Bottom w0.254: R14.1@-21.755,-1.524 v1(-21.082,-1.524) ; v1(7.565,-23.24) 8.188,-23.864 PC2.2
N173250840: C31.1 U5.1 | length 2.7
  Bottom w0.254: C31.1 U5.1@23.876,-6.878
N173253942: Q4.1 R15.2 | length 2
  Bottom w0.254: R15.2@-23.188,8.574 -23.188,6.747 Q4.1
RTS_485: J2.9 U3.2 U3.3 | length 53.5
  Top w0.254: J2.9 -20.34,11.25 -22.08,9.51 -22.08,0.236 -12.633,-9.211 -5.848,-9.211 -0.145,-14.913 2.738,-14.913 6.165,-18.34 v1(7.239,-18.34)
  Bottom w0.254: v1@7.248,-18.331 v1(7.239,-18.34) U3.2@8.486,-18.34 ; U3.3 U3.2@8.495,-18.349
SD0_CLK: J2.14
SD0_CMD: J2.13
SD0_DATA0: J2.17
SD0_DATA1: J2.18
SD0_DATA2: J2.16
SD0_DATA3: J2.15
SD0_INS: J1.35
TDN_OUT1: J2.3 J4.27 | length 24
  Top w0.254: J2.3 -17.272,12.75 -16.891,13.131 -16.891,13.603 -16.42,14.073 v1(-15.993,14.073) ; v1(0.633,22.06) 0.75,21.942 J4.27
  Bottom w0.254: v1(-15.993,14.073) -14.207,14.073 -7.198,21.082 -0.345,21.082 v1(0.633,22.06)
TDN_OUT2: J2.6 J4.28 | length 24.9
  Top w0.254: v1(-16.646,12.25) J2.6 ; v1(1.25,22.372) J4.28
  Bottom w0.254: v1(-16.646,12.25) -15.388,12.25 -7.01,20.628 -0.157,20.628 1.25,22.035 v1(1.25,22.372)
TRX_N: J7.5 R23.2 R26.2 | length 8.9
  Bottom w0.254: R23.2 -7.334,-15.748 -6.816,-15.23 J7.5 -1.153,-15.23 -0.724,-15.659 R26.2
TRX_P: J7.4 R26.1 R29.2 | length 8.4
  Bottom w0.254: R29.2@-8.207,-13.98 J7.4 R26.1@0.175,-13.98
UART0_RXD: J1.34 J8.2 | length 8.1
  Top w0.254: J1.34 19.672,5.85 v1(19.939,6.117)
  Bottom w0.254: v1(19.939,6.117) 19.979,6.117 20.953,7.092 20.953,10.158 21.925,11.13 J8.2
UART0_TXD: J1.36 J8.3 | length 10.1
  Top w0.254: J1.36 20.136,5.35 20.433,5.647 20.433,6.451 20.153,6.731 v1(19.939,6.731)
  Bottom w0.254: v1(19.939,6.731) 19.946,6.731 20.447,7.232 ; 20.447,7.239 20.447,11.213 21.446,12.212 J8.3
UART1_RXD: J1.4 R31.1 | length 3.5
  Top w0.254: v1(17.033,13.35) J1.4
  Bottom w0.254: R31.1 15.235,13.012 16.695,13.012 v1(17.033,13.35)
UART1_TXD: J1.12 R25.1 U3.4 | length 54.4
  Top w0.254: v1(9.642,11.303) 6.477,11.303 -1.651,3.175 -1.651,0.169 0.804,-2.285 0.804,-6.429 10.414,-16.039 v1(10.414,-18.918) ; v1(17.033,11.35) J1.12
  Bottom w0.254: U3.4 9.746,-20.871 10.033,-20.584 10.033,-19.299 10.409,-18.923 v1@10.419,-18.923 ; v1(9.642,11.303) 9.689,11.35 v1(17.033,11.35) ; v1(10.414,-18.918) v1@10.419,-18.923 ; R25.1 v1@10.419,-18.923
VD_CS: J1.11 J4.37 | length 14.4
  Top w0.254: v1(5.715,19.836) J4.37@5.715,20.865 ; v1(7.786,17.057) 13.493,11.35 J1.11
  Bottom w0.254: v1(5.715,19.836) 5.715,19.128 v1(7.786,17.057)
VD_D0: J2.35 J4.11 | length 21.4
  Top w0.254: J2.35@-17.981,4.75 v1(-16.764,4.75) ; v1(-11.141,10.464) -11.141,15.575 -7.25,19.466 J4.11
  Bottom w0.254: v1(-16.764,4.75) -16.665,4.75 -11.141,10.274 v1(-11.141,10.464)
VD_D1: J2.33 J4.12 | length 23.5
  Top w0.254: J2.33 v1(-17.152,5.25) ; v1(-10.676,11.676) -10.676,15.399 -6.75,19.324 J4.12
  Bottom w0.254: v1(-17.152,5.25) -17.102,5.25 v1(-10.676,11.676)
VD_D2: J2.40 J4.13 | length 22.4
  Top w0.254: J2.40 v1(-13.716,3.75) ; v1(-11.587,4.596) -11.587,8.987 -10.222,10.352 -10.222,15.211 -6.25,19.182 J4.13
  Bottom w0.254: v1(-13.716,3.75) -12.433,3.75 v1(-11.587,4.596)
VD_D3: J2.36 J4.14 | length 24
  Top w0.254: J2.36 v1(-12.845,4.75) ; v1(-11.118,6.731) -11.118,8.814 -9.768,10.164 -9.768,15.023 -5.75,19.04 J4.14
  Bottom w0.254: v1(-12.845,4.75) -11.118,6.476 v1(-11.118,6.731)
VD_D4: J2.38 J4.16 | length 25
  Top w0.254: J2.38 v1(-13.327,4.25) ; v1(-10.649,6.176) -10.649,8.641 -9.314,9.976 -9.314,14.835 -4.75,19.398 J4.16
  Bottom w0.254: v1(-13.327,4.25) -12.575,4.25 v1(-10.649,6.176)
VD_D5: J2.37 J4.17 | length 23.3
  Top w0.254: J2.37 v1(-17.152,4.25) ; v1@-8.86,12.065 -8.86,14.647 -4.25,19.256 J4.17
  Bottom w0.254: v1(-17.152,4.25) -16.523,4.25 -8.89,11.883 v1(-8.89,12.065)
VD_D6: J2.41 J4.18 | length 27.4
  Top w0.254: J2.41 v1(-17.152,3.25) ; v1(-8.86,10.426) -8.86,11.256 -8.393,11.722 -8.393,14.471 -3.75,19.114 J4.18
  Bottom w0.254: v1(-17.152,3.25) -16.054,3.25 -8.878,10.426 v1(-8.86,10.426)
VD_D7: J2.39 J4.19 | length 24.3
  Top w0.254: J2.39 v1(-16.764,3.75) ; v1(-7.939,12.192) -7.939,14.283 -3.25,18.972 J4.19
  Bottom w0.254: v1(-16.764,3.75) -16.381,3.75 v1(-7.939,12.192)
VD_D8: J2.44 J4.21 | length 25.2
  Top w0.254: J2.44 v1(-13.716,2.75) ; v1(-10.649,4.25) -10.195,4.704 -10.195,8.448 -8.382,10.261 -8.382,11.041 -7.485,11.938 -7.485,13.955 -2.25,19.19 J4.21
  Bottom w0.254: v1(-13.716,2.75) -12.149,2.75 v1(-10.649,4.25)
VD_D9: J2.46 J4.22 | length 28.7
  Top w0.254: J2.46 v1(-14.097,2.25) ; v1(-9.906,4.25) -9.741,4.415 -9.741,8.26 -7.928,10.073 -7.928,10.853 -7.031,11.75 -7.031,13.67 -1.75,18.951 J4.22
  Bottom w0.254: v1(-14.097,2.25) -11.906,2.25 v1(-9.906,4.25)
VD_D10: J2.42 J4.23 | length 25.1
  Top w0.254: J2.42 v1(-14.097,3.25) ; v1(-9.204,6.306) -9.204,8.155 -7.474,9.885 -7.474,10.665 -6.577,11.562 -6.577,13.438 -1.25,18.765 J4.23
  Bottom w0.254: v1(-14.097,3.25) -12.291,3.25 -9.235,6.306 v1(-9.204,6.306)
VD_D11: J2.43 J4.24 | length 29.3
  Top w0.254: J2.43 v1(-16.764,2.75) ; v1(-6.096,12.827) -6.096,13.208 -0.75,18.554 J4.24
  Bottom w0.254: v1(-16.764,2.75) -15.798,2.75 -6.096,12.452 v1(-6.096,12.827)
VD_HS: J2.45 J4.6 | length 26.7
  Top w0.254: v1(-19.431,2.25) J2.45 J2.45@-17.953,2.25 ; v1(-12.503,12.776) -12.503,16.14 -9.75,18.893 J4.6
  Bottom w0.254: v1(-19.431,2.25) -19.015,2.666 -19.015,6.264 v1(-12.503,12.776)
VD_PCLK: J2.50 J4.9 | length 25.2
  Top w0.254: v1(-16.129,1.225) J2.50 ; v1(-12.47,10.877) -11.595,11.752 -11.595,15.763 -8.25,19.108 J4.9
  Bottom w0.254: v1(-16.129,1.225) -17.653,2.749 -17.653,5.694 v1(-12.47,10.877)
VD_RSTN: J1.1 J4.36 | length 16.7
  Top w0.254: v1(5.25,18.753) J4.36 ; v1(8.869,16.616) 11.61,13.875 J1.1
  Bottom w0.254: v1(5.25,18.753) 7.4,16.603 8.856,16.603 v1(8.869,16.616)
VD_SCK: J1.8 J4.35 | length 18.2
  Top w0.254: J4.35 4.75,18.611 10.201,13.16 10.27,13.16 v1(11.08,12.35) ; v1(17.033,12.35) J1.8
  Bottom w0.254: v1(11.08,12.35) v1(17.033,12.35)
VD_SIMO: J1.10 J4.34 | length 21.6
  Top w0.254: J4.34 4.25,18.451 v1(10.418,12.283) ; v1(16.637,11.85) J1.10
  Bottom w0.254: v1(10.418,12.283) 10.851,11.85 v1(16.637,11.85)
VD_SOMI: J1.13 J4.38 | length 17.4
  Top w0.254: J4.38 6.25,17.951 13.351,10.85 J1.13
VD_VS: J2.47 J4.7 | length 24.2
  Top w0.254: v1(-19.05,1.75) J2.47 ; v1(-12.474,12.163) -12.049,12.588 -12.049,15.951 -9.25,18.75 J4.7
  Bottom w0.254: v1(-19.05,1.75) -18.561,2.239 -18.561,6.076 v1(-12.474,12.163)
VOUT0_CON: D3.2 J7.2 R27.2 SAB1.2 | length 25.1
  Top w0.254: v1(-13.374,-11.44) -8.999,-11.44 -7.866,-12.573 v1(-5.08,-12.573)
  Bottom w0.254: R27.2 -24.003,-13.25 -23.835,-13.418 SAB1.2 D3.2@-19.442,-13.418 ; D3.2 -16.831,-13.529 -14.742,-11.44 v1(-13.374,-11.44) ; v1(-5.08,-12.573) -5.06,-12.573 -3.927,-11.44 J7.2
ZOOM_CTRL_CLK: J2.28
ZOOM_CTRL_DIR: J2.32
ZOOM_CTRL_EN: J2.25
ZOOM_CTRL_NFAULT: J2.19
ZOOM_CTRL_NSLEEP: J2.22
pads on no net: D3.3 J1.3 J1.6 J1.19 J1.20 J1.21 J1.23 J1.25 J1.38 J1.40 J1.42 J2.5 J2.7 J2.20 J4.4 J4.29 J4.32 J7.3 SW1.5 SW1.6 U1.7

## Polygon pours and split planes (outlines as drawn)
GND on Bottom "Bottom-No Net" (solid, remove dead copper, pour order 2): -32.493,44.113 -33.763,42.843 -33.763,28.365 -33.763,-41.612 -30.588,-44.787 -28.683,-46.692 31.134,-46.692 32.912,-46.692 36.087,-43.517 35.071,-42.501 35.071,41.192 35.071,42.716 34.944,42.843
GND on Top "Top_GND" (solid, remove dead copper, pour order 4): -33.023,39.747 -33.912,38.858 -33.912,-43.565 -33.912,-45.216 -30.991,-48.137 -30.356,-47.502 28.826,-47.502 28.826,-46.105 31.874,-43.057 33.779,-41.152 33.779,38.096 33.779,39.493 31.366,41.906

## Keep-outs
Keep-Out Layer:
  lines w0.127: -30.234,-4.022 ccw(c0,0) -6.011,-29.902 ; -30.234,-4 -25,-4 -25,4 -30.234,4 ; -30.234,4.022 cw(c0,0) -6.018,29.9 ; -6,-29.9 -6,-25 6,-25 6,-29.9 ; -6,29.9 -6,25 6,25 6,29.9 ; 6.008,-29.902 ccw(c0,0) 30.236,-4.001 ; 6.011,29.902 cw(c0,0) 30.234,4.018 ; 30.228,-4 25,-4 25,4 30.234,4

## Other copper
Bottom:
  pour cut-out: 22.543,-9.779 15.557,-9.779 15.557,-16.764 22.543,-16.764

## Silkscreen, mask and mechanical layers (free items; w line width, h text height)
Solder Mask Top:
  lines w1: -29.738,-3.956 ccw(c0,0) -5.913,-29.412 ; -29.738,3.956 cw(c0,0) -5.919,29.41 ; 5.91,-29.412 ccw(c0,0) 29.741,-3.936 ; 5.913,29.412 cw(c0,0) 29.739,3.952
Solder Mask Bottom:
  lines w1: -29.738,-3.956 ccw(c0,0) -5.913,-29.412 ; -29.738,3.956 cw(c0,0) -5.919,29.41 ; 5.91,-29.412 ccw(c0,0) 29.741,-3.936 ; 5.913,29.412 cw(c0,0) 29.739,3.952